# Altium PCB SW.PcbDoc (part 2 of 2)
Units mm, origin at the board's own origin, x right, y up, seen from the top; angles counter-clockwise.
Board outline 130 x 71 mm, 4 copper layers (Top Layer, Mid Layer 1, Mid Layer 2, Bottom Layer), stack 0.97 mm thick; 152 components, 272 nets, 858 pads, 548 vias.
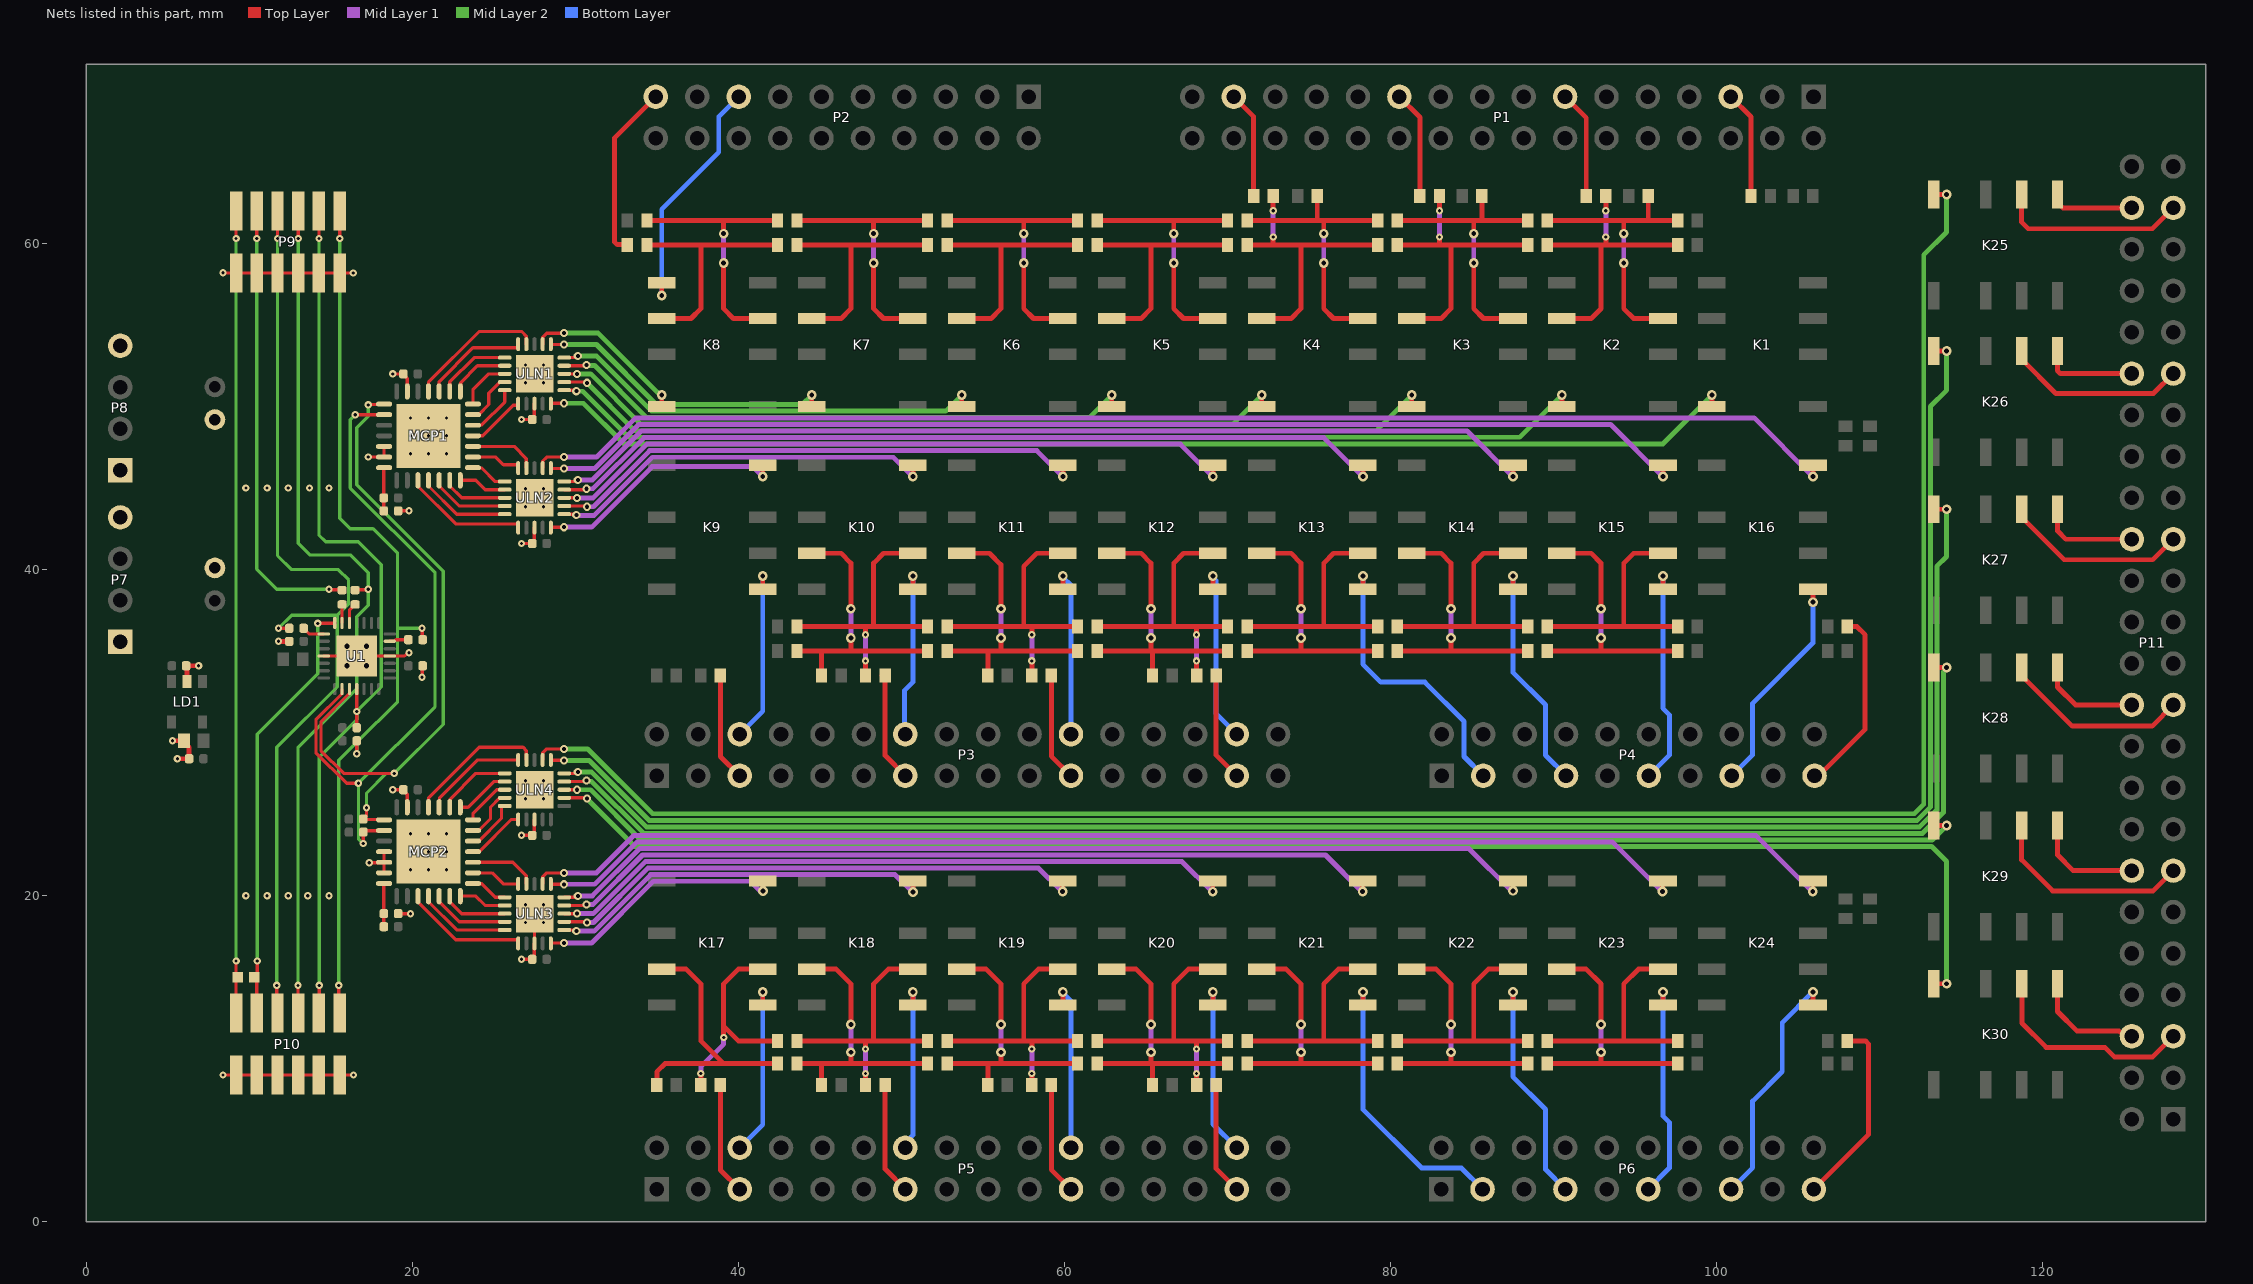
[diagram p4: the nets of this part, all layers, seen from the top]

## Via types
v1: diameter 0.45, hole 0.2, Top Layer to Bottom Layer, 300 vias
v2: diameter 0.6, hole 0.3, Top Layer to Bottom Layer, 176 vias
v3: diameter 0.5, hole 0.2, Top Layer to Bottom Layer, 34 vias
v4: diameter 0.5, hole 0.25, Top Layer to Bottom Layer, 30 vias
v5: diameter 0.66, hole 0.33, Top Layer to Bottom Layer, 4 vias
v6: diameter 5.5, hole 3, Top Layer to Bottom Layer, 4 vias

## Nets (pads, with @x,y where several pads share a name; then routed paths per layer and width w, separated by ;. In a path a pad name is that pad's centre, name@x,y a point inside that pad or via, vN(x,y) a via of type N, cw(c..) or ccw(c..) an arc to the next point about the centre after c; other vN are vias at no path point) (continued)
Bd18: K8.5 P2.15 | length 15
  Top Layer w0.3: v2(35.3,56.8) K8.5@35.3,57.6
  Bottom Layer w0.3: v2(35.3,56.8) 35.3,62.1 38.8,65.6 38.8,67.78 P2.15@40.02,69
Bd21: K9.5 P3.6 | length 11.1
  Top Layer w0.3: K9.5@41.5,38.8 v2(41.5,39.6)
  Bottom Layer w0.3: P3.6@40.08,29.9 41.5,31.32 v2(41.5,39.6)
Bd22: K10.5 P3.14 | length 10.7
  Top Layer w0.3: K10.5@50.7,38.8 v2(50.7,39.6)
  Bottom Layer w0.3: P3.14@50.24,29.9 50.2,29.94 50.2,32.6 50.7,33.1 v2(50.7,39.6)
Bd23: K11.5 P3.22 | length 10.7
  Top Layer w0.3: K11.5@59.9,38.8 v2(59.9,39.6)
  Bottom Layer w0.3: v2(59.9,39.6) 59.9,39.539 60.4,39.039 P3.22@60.4,29.9
Bd24: K12.5 P3.30 | length 11.1
  Top Layer w0.3: K12.5@69.1,38.8 v2(69.1,39.6)
  Bottom Layer w0.3: v2(69.1,39.6) 69.1,39.519 69.3,39.319 69.3,31.16 P3.30@70.56,29.9
Bd25: K13.5 P4.3 | length 17.7
  Top Layer w0.3: K13.5@78.3,38.8 v2(78.3,39.6)
  Bottom Layer w0.3: v2(78.3,39.6) 78.3,34.2 79.4,33.1 82.1,33.1 84.5,30.7 84.5,28.54 P4.3@85.68,27.36
Bd26: K14.5 P4.7 | length 14.4
  Top Layer w0.3: K14.5@87.5,38.8 v2(87.5,39.6)
  Bottom Layer w0.3: v2(87.5,39.6) 87.5,33.7 89.5,31.7 89.5,28.62 P4.7@90.76,27.36
Bd27: K15.5 P4.11 | length 13.7
  Top Layer w0.3: K15.5@96.7,38.8 v2(96.7,39.6)
  Bottom Layer w0.3: P4.11@95.84,27.36 97.1,28.62 97.1,31.1 96.7,31.5 v2(96.7,39.6)
Bd28: K16.5 P4.15 | length 13.5
  Top Layer w0.3: v2(105.9,38) K16.5@105.9,38.8
  Bottom Layer w0.3: P4.15@100.92,27.36 102.2,28.64 102.2,31.8 105.9,35.5 v2(105.9,38)
Bd31: K17.5 P5.6 | length 10.9
  Top Layer w0.3: K17.5@41.5,13.3 v2(41.5,14.1)
  Bottom Layer w0.3: P5.6@40.08,4.54 41.5,5.96 v2(41.5,14.1)
Bd32: K18.5 P5.14 | length 10.6
  Top Layer w0.3: K18.5@50.7,13.3 v2(50.7,14.1)
  Bottom Layer w0.3: P5.14@50.24,4.54 50.24,4.856 50.7,5.316 v2(50.7,14.1)
Bd33: K19.5 P5.22 | length 10.6
  Top Layer w0.3: K19.5@59.9,13.3 v2(59.9,14.1)
  Bottom Layer w0.3: v2(59.9,14.1) 59.9,14.039 60.4,13.539 P5.22@60.4,4.54
Bd34: K20.5 P5.30 | length 11
  Top Layer w0.3: K20.5@69.1,13.3 v2(69.1,14.1)
  Bottom Layer w0.3: v2(69.1,14.1) 69.1,6 P5.30@70.56,4.54
Bd35: K21.5 P6.3 | length 17.4
  Top Layer w0.3: K21.5@78.3,13.3 v2(78.3,14.1)
  Bottom Layer w0.3: v2(78.3,14.1) 78.3,6.9 81.9,3.3 84.34,3.3 P6.3@85.64,2
Bd36: K22.5 P6.7 | length 14.2
  Top Layer w0.3: K22.5@87.5,13.3 v2(87.5,14.1)
  Bottom Layer w0.3: v2(87.5,14.1) 87.5,8.9 89.5,6.9 89.5,3.22 P6.7@90.72,2
Bd37: K23.5 P6.11 | length 13.6
  Top Layer w0.3: K23.5@96.7,13.3 v2(96.7,14.1)
  Bottom Layer w0.3: P6.11@95.8,2 97.1,3.3 97.1,6.1 96.7,6.5 v2(96.7,14.1)
Bd38: K24.5 P6.15 | length 15
  Top Layer w0.3: K24.5@105.9,13.3 v2(105.9,14.1)
  Bottom Layer w0.3: P6.15@100.88,2 102.2,3.32 102.2,7.4 104.021,9.221 104.021,12.221 v2(105.9,14.1)
Bd41: K30.5 P11.6 | length 6.9
  Top Layer w0.3: K30.5@120.9,14.6 120.9,12.9 122.1,11.7 124.684,11.7 124.775,11.61 125.23,11.61 P11.6@125.46,11.38
Bd42: K29.5 P11.14 | length 6.8
  Top Layer w0.3: K29.5@120.9,24.3 120.9,22.5 121.86,21.54 P11.14@125.46,21.54
Bd43: K28.5 P11.22 | length 6.2
  Top Layer w0.3: K28.5@120.9,34 120.9,32.8 122,31.7 P11.22@125.46,31.7
Bd44: K27.5 P11.30 | length 6.1
  Top Layer w0.3: K27.5@120.9,43.7 120.9,42.376 121.416,41.86 P11.30@125.46,41.86
Bd45: K26.5 P11.38 | length 5.8
  Top Layer w0.3: K26.5@120.9,53.4 120.9,52.196 121.076,52.02 P11.38@125.46,52.02
Bd46: K25.5 P11.46 | length 5.2
  Top Layer w0.3: K25.5@120.9,63 120.9,62.5 121.22,62.18 P11.46@125.46,62.18
Bs11: P1.5 R2.2 | length 6.6
  Top Layer w0.3: P1.5@100.86,69 102.1,67.76 R2.2@102.1,62.9
Bs12: P1.13 R4.2 | length 6.6
  Top Layer w0.3: P1.13@90.7,69 92,67.7 R4.2@92,62.9
Bs13: P1.21 R6.2 | length 6.6
  Top Layer w0.3: P1.21@80.54,69 81.8,67.74 R6.2@81.8,62.9
Bs14: P1.29 R8.2 | length 6.6
  Top Layer w0.3: P1.29@70.38,69 71.6,67.78 R8.2@71.6,62.9
Bs18: P2.19 R10.2 | length 10.8
  Top Layer w0.3: R10.2@33.2,59.9 33.176,59.924 32.576,59.924 32.4,60.1 32.4,66.46 P2.19@34.94,69
Bs21: P3.5 R28.2 | length 6.6
  Top Layer w0.3: R28.2@38.9,33.5 38.9,28.54 P3.5@40.08,27.36
Bs22: P3.13 R30.2 | length 6.7
  Top Layer w0.3: R30.2@48.8,33.5 49,33.3 49,28.6 P3.13@50.24,27.36
Bs23: P3.21 R32.2 | length 6.6
  Top Layer w0.3: R32.2@59.2,33.5 59.2,28.56 P3.21@60.4,27.36
Bs24: P3.29 R34.2 | length 6.7
  Top Layer w0.3: R34.2@69.3,33.5 69.3,28.62 P3.29@70.56,27.36
Bs28: P4.19 R36.2 | length 11.4
  Top Layer w0.3: P4.19@106,27.36 106.26,27.36 109.1,30.2 109.1,36 108.6,36.5 R36.2@108,36.5
Bs31: P5.5 R54.2 | length 6.9
  Top Layer w0.3: R54.2@38.9,8.4 38.9,3.18 P5.5@40.08,2
Bs32: P5.13 R56.2 | length 6.9
  Top Layer w0.3: R56.2@49,8.4 49,3.24 P5.13@50.24,2
Bs33: P5.21 R58.2 | length 6.9
  Top Layer w0.3: R58.2@59.2,8.4 59.2,3.2 P5.21@60.4,2
Bs34: P5.29 R60.2 | length 6.9
  Top Layer w0.3: R60.2@69.3,8.4 69.3,3.26 P5.29@70.56,2
Bs38: P6.19 R62.2 | length 11.7
  Top Layer w0.3: P6.19@105.96,2 109.3,5.34 109.3,10.924 109.124,11.1 R62.2@108,11.1
Bs41: K30.6 P11.5 | length 13.1
  Top Layer w0.3: K30.6@118.7,14.6 118.724,14.576 118.724,12.176 120.2,10.7 123.8,10.7 124.4,10.1 126.72,10.1 P11.5@128,11.38
Bs42: K29.6 P11.13 | length 12.7
  Top Layer w0.3: K29.6@118.7,24.3 118.7,22.2 120.6,20.3 126.76,20.3 P11.13@128,21.54
Bs43: K28.6 P11.21 | length 11.6
  Top Layer w0.3: K28.6@118.7,34 118.7,33.5 121.8,30.4 126.7,30.4 P11.21@128,31.7
Bs44: K27.6 P11.29 | length 11.4
  Top Layer w0.3: K27.6@118.7,43.7 118.7,43.2 121.3,40.6 126.74,40.6 P11.29@128,41.86
Bs45: K26.6 P11.37 | length 11.2
  Top Layer w0.3: K26.6@118.7,53.4 118.7,52.9 120.8,50.8 126.78,50.8 P11.37@128,52.02
Bs46: K25.6 P11.45 | length 11.7
  Top Layer w0.3: K25.6@118.7,63 118.7,61.3 119.1,60.9 126.72,60.9 P11.45@128,62.18
GND: C1.1 C2.1 C3.2 C4.2 C5.1 C6.1 C7.2 C8.2 C9.2 C10.2 C11.2 C12.2 C13.2 C14.2 C15.2 LD1.2 MCP1.6 MCP1.12 MCP1.13 MCP1.29 MCP2.6 MCP2.11 MCP2.12 MCP2.13 MCP2.29 P7.1 P7.4 P8.1 P8.4 P9.1 P9.3 P9.5 P9.7 P9.9 P9.11 P10.1 P10.3 P10.5 P10.7 P10.9 P10.11 U1.4 U1.18 U1.29 ULN1.8 ULN1.21 ULN2.8 ULN2.21 ULN3.8 ULN3.21 ULN4.8 ULN4.21 | length 44.6
  Top Layer w0.2: v1(8.4,9) P10.1@9.2,9 P10.11@15.55,9 v1(16.4,9) ; v1(8.4,58.2) 8.4,58.19 P9.1@9.2,58.19 P9.11@15.55,58.19 v1(16.39,58.19) ; U1.18@14.575,34.7 U1.29@16.6,34.7 U1.4@18.625,34.7 19.532,34.7 19.732,34.9 v1(19.8,34.9) ; v1(17.3,46.9) MCP1.13@18.275,46.9 MCP1.12@18.275,47.55 ; v1(17.368,22.027) 18.252,22.027 MCP2.12@18.275,22.05 ; MCP2.13@18.275,21.4 MCP2.12@18.275,22.05 ; MCP2.11@18.275,22.7 MCP2.12@18.275,22.05 ; v1(18.8,26.5) C5.1@19.46,26.5 19.46,26.464 19.7,26.224 MCP2.6@19.7,25.425 ; v1(18.8,52) C1.1@19.46,52 19.46,51.964 19.7,51.724 MCP1.6@19.7,50.925 ; C6.1@19.14,18.9 v1(19.9,18.9) ; C2.1@19.14,43.6 v1(19.8,43.6) ; v1(20.6,33.4) 20.62,33.42 20.62,34.08 C14.2@20.64,34.1 C14.2@20.64,34.136 ; v1(26.7,16.1) C7.2@27.36,16.1 27.49,16.23 27.49,17.065 ULN3.8@27.5,17.075 ULN3.21@27.5,18.9 ; v1(26.7,23.7) C8.2@27.36,23.7 27.49,23.83 27.49,24.665 ULN4.8@27.5,24.675 ; v1(26.7,41.6) C4.2@27.36,41.6 27.49,41.73 27.49,42.565 ULN2.8@27.5,42.575 ; v1(26.7,49.2) C3.2@27.36,49.2 27.49,49.33 27.49,50.165 ULN1.8@27.5,50.175
  Top Layer w0.3: v1(5.3,29.5) C12.2@6,29.5 6,29.41 6.32,29.09 C13.2@6.32,28.4 v1(5.6,28.4) ; C11.2@6.14,34.1 C11.2@6.2,34.1 ; LD1.2@6.2,33.15 C11.2@6.2,34.1 ; v1(6.9,34.1) C11.2@6.2,34.1 ; v1(11.8,35.6) C15.2@12.46,35.6
  other v1: 9.8,20 11.1,20 12.4,20 13.6,20 14.9,20 9.8,45 11.1,45 12.4,45 13.7,45 14.9,45
  other v3: 26.95,18.35 28.05,18.35 26.95,19.45 28.05,19.45 19.9,21.6 21,21.6 22.1,21.6 19.9,22.7 21,22.7 22.1,22.7 19.9,23.8 21,23.8 22.1,23.8 26.95,25.95 28.05,25.95 26.95,27.05 28.05,27.05 26.95,43.85 28.05,43.85 26.95,44.95 28.05,44.95 19.9,47.1 21,47.1 22.1,47.1 19.9,48.2 21,48.2 22.1,48.2 19.9,49.3 21,49.3 22.1,49.3 26.95,51.45 28.05,51.45 26.95,52.55 28.05,52.55
  other v5: 16,34.1 17.2,34.1 16,35.3 17.2,35.3
INT: P9.12 P10.12 R80.1 R82.2 | length 56.7
  Top Layer w0.2: v1(15.5,14.5) 15.5,12.86 P10.12@15.55,12.81 ; v1(15.55,60.3) P9.12@15.55,62 ; v1(16.6,28.7) R82.2@16.6,29.5 ; v1(20.6,36.4) 20.62,36.38 20.62,35.72 R80.1@20.64,35.7
  Mid Layer 2 w0.2: v1(15.5,14.5) 15.5,28.3 16.6,29.4 ; v1(15.55,60.3) 15.55,43.15 16.2,42.5 17.6,42.5 19.1,41 19.1,36.4 ; v1(16.6,28.7) 16.6,29.4 ; v1(20.6,36.4) 19.1,36.4 ; 16.6,29.4 19.1,31.9 19.1,36.4
MISO: J1.2 P9.2 P10.2 | length 49.3
  Top Layer w0.2: P10.2@9.2,12.81 J1.2@9.2,14.908 ; v1(9.2,16) J1.2@9.2,14.908 ; v1(9.2,60.3) P9.2@9.2,62 ; J1.2@9.292,15 J1.2@9.2,14.908
  Mid Layer 2 w0.2: v1(9.2,16) v1(9.2,60.3)
MISO_T88: J1.1 P10.4 U1.14 | length 26.6
  Top Layer w0.2: P10.4@10.47,12.81 10.47,14.838 J1.1@10.308,15 10.5,15.192 v1(10.5,16) ; v1(14.2,36.7) 14.212,36.712 15.25,36.712 U1.14@15.25,36.725
  Mid Layer 2 w0.2: v1(10.5,16) 10.5,29.9 14.2,33.6 v1(14.2,36.7)
MOSI_T88: P9.4 R78.1 | length 27.7
  Top Layer w0.2: v1(10.47,60.3) P9.4@10.47,62 ; v1(14.9,38.8) 14.93,38.77 15.67,38.77 R78.1@15.7,38.74
  Mid Layer 2 w0.2: v1(10.47,60.3) 10.47,40.03 11.7,38.8 v1(14.9,38.8)
NetC2_2: C2.2 MCP1.14 R37.2 | length 2.7
  Top Layer w0.2: C2.2@18.26,43.6 R37.2@18.26,44.4 18.26,46.235 MCP1.14@18.275,46.25
NetC6_2: C6.2 MCP2.14 R52.2 | length 2.7
  Top Layer w0.2: R52.2@18.26,18.1 C6.2@18.26,18.9 18.26,20.735 MCP2.14@18.275,20.75
NetK2_3: K2.3 R3.1 R11.2 R12.1 | length 17.6
  Top Layer w0.3: R12.1@89.6,61.4 94.2,61.4 ; v2(94.3,58.8) 94.3,56 94.9,55.4 K2.3@96.7,55.4 ; v2(94.3,60.6) 94.3,61.3 94.2,61.4 ; R3.1@95.8,62.9 95.8,61.457 95.836,61.421 ; R11.2@97.6,61.4 94.2,61.4
  Mid Layer 1 w0.3: v2(94.3,58.8) v2(94.3,60.6)
NetK2_6: K2.6 R4.1 R18.2 R19.1 | length 17.5
  Top Layer w0.3: R19.1@89.6,59.9 92.9,59.9 ; K2.6@90.5,55.4 92.3,55.4 92.9,56 92.9,59.9 ; 93.2,59.9 v1(93.2,60.4) ; v1(93.2,62) R4.1@93.2,62.9 ; R18.2@97.6,59.9 92.9,59.9
  Mid Layer 1 w0.3: v1(93.2,60.4) v1(93.2,62)
NetK3_3: K3.3 R5.1 R12.2 R13.1 | length 17.6
  Top Layer w0.3: R13.1@80.4,61.4 85,61.4 ; v2(85.1,58.8) 85.1,56 85.7,55.4 K3.3@87.5,55.4 ; v2(85.1,60.6) 85.1,61.3 85,61.4 ; R5.1@85.6,62.9 85.6,61.4 ; R12.2@88.4,61.4 85.6,61.4 ; 85,61.4 85.6,61.4
  Mid Layer 1 w0.3: v2(85.1,58.8) v2(85.1,60.6)
NetK3_6: K3.6 R6.1 R19.2 R20.1 | length 17.5
  Top Layer w0.3: R20.1@80.4,59.9 83,59.9 ; K3.6@81.3,55.4 83.1,55.4 83.7,56 83.7,59.9 ; v1(83,60.4) 83,59.9 ; v1(83,62) R6.1@83,62.9 ; R19.2@88.4,59.9 83.7,59.9 ; 83,59.9 83.7,59.9
  Mid Layer 1 w0.3: v1(83,60.4) v1(83,62)
NetK4_3: K4.3 R7.1 R13.2 R14.1 | length 17.6
  Top Layer w0.3: R14.1@71.2,61.4 75.5,61.4 ; R7.1@75.5,62.9 75.5,61.4 ; v2(75.9,58.8) 75.9,56 76.5,55.4 K4.3@78.3,55.4 ; v2(75.9,60.6) 75.9,61.3 75.8,61.4 ; R13.2@79.2,61.4 75.8,61.4 ; 75.5,61.4 75.8,61.4
  Mid Layer 1 w0.3: v2(75.9,58.8) v2(75.9,60.6)
NetK4_6: K4.6 R8.1 R20.2 R21.1 | length 17.5
  Top Layer w0.3: R21.1@71.2,59.9 74.5,59.9 ; K4.6@72.1,55.4 73.9,55.4 74.5,56 74.5,59.9 ; 72.8,59.9 v1(72.8,60.4) ; v1(72.8,62) R8.1@72.8,62.9 ; R20.2@79.2,59.9 74.5,59.9
  Mid Layer 1 w0.3: v1(72.8,60.4) v1(72.8,62)
NetK5_3: K5.3 R14.2 R15.1 | length 16.1
  Top Layer w0.3: R15.1@62,61.4 66.6,61.4 ; v2(66.7,58.8) 66.7,56 67.3,55.4 K5.3@69.1,55.4 ; v2(66.7,60.6) 66.7,61.3 66.6,61.4 ; R14.2@70,61.4 66.6,61.4
  Mid Layer 1 w0.3: v2(66.7,58.8) v2(66.7,60.6)
NetK5_6: K5.6 R21.2 R22.1 | length 14.5
  Top Layer w0.3: R22.1@62,59.9 65.3,59.9 ; K5.6@62.9,55.4 64.7,55.4 65.3,56 65.3,59.9 ; R21.2@70,59.9 65.3,59.9
NetK6_3: K6.3 R15.2 R16.1 | length 16.1
  Top Layer w0.3: R16.1@52.8,61.4 57.4,61.4 ; v2(57.5,58.8) 57.5,56 58.1,55.4 K6.3@59.9,55.4 ; v2(57.5,60.6) 57.5,61.3 57.4,61.4 ; R15.2@60.8,61.4 57.4,61.4
  Mid Layer 1 w0.3: v2(57.5,58.8) v2(57.5,60.6)
NetK6_6: K6.6 R22.2 R23.1 | length 14.5
  Top Layer w0.3: R23.1@52.8,59.9 56.1,59.9 ; K6.6@53.7,55.4 55.5,55.4 56.1,56 56.1,59.9 ; R22.2@60.8,59.9 56.1,59.9
NetK7_3: K7.3 R16.2 R17.1 | length 16.1
  Top Layer w0.3: R17.1@43.6,61.4 48.2,61.4 ; v2(48.3,58.8) 48.3,56 48.9,55.4 K7.3@50.7,55.4 ; v2(48.3,60.6) 48.3,61.3 48.2,61.4 ; R16.2@51.6,61.4 48.2,61.4
  Mid Layer 1 w0.3: v2(48.3,58.8) v2(48.3,60.6)
NetK7_6: K7.6 R23.2 R24.1 | length 14.5
  Top Layer w0.3: R24.1@43.6,59.9 46.9,59.9 ; K7.6@44.5,55.4 46.3,55.4 46.9,56 46.9,59.9 ; R23.2@51.6,59.9 46.9,59.9
NetK8_3: K8.3 R9.1 R17.2 | length 16.1
  Top Layer w0.3: R9.1@34.4,61.4 39,61.4 ; v2(39.1,58.8) 39.1,56 39.7,55.4 K8.3@41.5,55.4 ; v2(39.1,60.6) 39.1,61.3 39,61.4 ; R17.2@42.4,61.4 39,61.4
  Mid Layer 1 w0.3: v2(39.1,58.8) v2(39.1,60.6)
NetK8_6: K8.6 R10.1 R24.2 | length 14.5
  Top Layer w0.3: R10.1@34.4,59.9 37.7,59.9 ; K8.6@35.3,55.4 37.1,55.4 37.7,56 37.7,59.9 ; R24.2@42.4,59.9 37.7,59.9
NetK10_3: K10.3 R29.1 R38.2 R39.1 | length 17.6
  Top Layer w0.3: R38.2@43.6,35 45.1,35 ; K10.3@44.5,41 46.3,41 46.9,40.4 v2(46.9,37.6) ; R29.1@45.1,33.5 45.1,35 ; v2(46.9,35.8) 46.9,35.1 47,35 ; R39.1@51.6,35 47,35 ; 45.1,35 47,35
  Mid Layer 1 w0.3: v2(46.9,35.8) v2(46.9,37.6)
NetK10_6: K10.6 R30.1 R45.2 R46.1 | length 17.5
  Top Layer w0.3: R45.2@43.6,36.5 48.3,36.5 ; R30.1@47.8,33.5 v1(47.8,34.4) ; v1(47.8,36) 47.8,36.5 ; K10.6@50.7,41 48.9,41 48.3,40.4 48.3,36.5 ; R46.1@51.6,36.5 48.3,36.5
  Mid Layer 1 w0.3: v1(47.8,34.4) v1(47.8,36)
NetK11_3: K11.3 R31.1 R39.2 R40.1 | length 17.5
  Top Layer w0.3: R39.2@52.8,35 55.3,35 ; K11.3@53.7,41 55.4,41 56.1,40.3 v2(56.1,37.6) ; R31.1@55.3,33.5 55.3,35 ; v2(56.1,35.8) 56.1,35 ; R40.1@60.8,35 56.1,35 ; 55.3,35 56.1,35
  Mid Layer 1 w0.3: v2(56.1,35.8) v2(56.1,37.6)
NetK11_6: K11.6 R32.1 R46.2 R47.1 | length 17.5
  Top Layer w0.3: R46.2@52.8,36.5 57.6,36.5 ; R32.1@58,33.5 v1(58,34.4) ; v1(58,36) 58,36.5 ; K11.6@59.9,41 58.3,41 57.5,40.2 57.5,36.6 57.6,36.5 ; R47.1@60.8,36.5 58,36.5 ; 57.6,36.5 58,36.5
  Mid Layer 1 w0.3: v1(58,34.4) v1(58,36)
NetK12_3: K12.3 R33.1 R40.2 R41.1 | length 17.6
  Top Layer w0.3: R40.2@62,35 65.4,35 ; K12.3@62.9,41 64.7,41 65.3,40.4 v2(65.3,37.6) ; v2(65.3,35.8) 65.3,35.1 65.4,35 ; R33.1@65.4,33.5 65.4,35 ; R41.1@70,35 65.4,35
  Mid Layer 1 w0.3: v2(65.3,35.8) v2(65.3,37.6)
NetK12_6: K12.6 R34.1 R47.2 R48.1 | length 17.5
  Top Layer w0.3: R47.2@62,36.5 66.7,36.5 ; R34.1@68.1,33.5 v1(68.1,34.4) ; v1(68.1,36) 68.1,36.5 ; K12.6@69.1,41 67.3,41 66.7,40.4 66.7,36.5 ; R48.1@70,36.5 66.7,36.5
  Mid Layer 1 w0.3: v1(68.1,34.4) v1(68.1,36)
NetK13_3: K13.3 R41.2 R42.1 | length 16.1
  Top Layer w0.3: R41.2@71.2,35 74.6,35 ; K13.3@72.1,41 73.9,41 74.5,40.4 v2(74.5,37.6) ; v2(74.5,35.8) 74.5,35.1 74.6,35 ; R42.1@79.2,35 74.6,35
  Mid Layer 1 w0.3: v2(74.5,35.8) v2(74.5,37.6)
NetK13_6: K13.6 R48.2 R49.1 | length 14.5
  Top Layer w0.3: R48.2@71.2,36.5 75.9,36.5 ; K13.6@78.3,41 76.5,41 75.9,40.4 75.9,36.5 ; R49.1@79.2,36.5 75.9,36.5
NetK14_3: K14.3 R42.2 R43.1 | length 16.1
  Top Layer w0.3: R42.2@80.4,35 83.8,35 ; K14.3@81.3,41 83.1,41 83.7,40.4 v2(83.7,37.6) ; v2(83.7,35.8) 83.7,35.1 83.8,35 ; R43.1@88.4,35 83.8,35
  Mid Layer 1 w0.3: v2(83.7,35.8) v2(83.7,37.6)
NetK14_6: K14.6 R49.2 R50.1 | length 14.5
  Top Layer w0.3: R49.2@80.4,36.5 85.1,36.5 ; K14.6@87.5,41 85.7,41 85.1,40.4 85.1,36.5 ; R50.1@88.4,36.5 85.1,36.5
NetK15_3: K15.3 R43.2 R44.1 | length 16.1
  Top Layer w0.3: R43.2@89.6,35 93,35 ; K15.3@90.5,41 92.3,41 92.9,40.4 v2(92.9,37.6) ; v2(92.9,35.8) 92.9,35.1 93,35 ; R44.1@97.6,35 93,35
  Mid Layer 1 w0.3: v2(92.9,35.8) v2(92.9,37.6)
NetK15_6: K15.6 R50.2 R51.1 | length 14.5
  Top Layer w0.3: R50.2@89.6,36.5 94.3,36.5 ; K15.6@96.7,41 94.9,41 94.3,40.4 94.3,36.5 ; R51.1@97.6,36.5 94.3,36.5
NetK17_3: K17.3 R53.1 R63.1 | length 16.7
  Top Layer w0.3: R53.1@35,8.4 35,9.2 35.5,9.7 39.1,9.7 ; K17.3@35.3,15.5 36.8,15.5 37.7,14.6 37.7,11.1 39.1,9.7 ; R63.1@42.4,9.7 39.1,9.7
NetK17_6: K17.6 R54.1 R70.1 | length 13.2
  Top Layer w0.3: R54.1@37.7,8.4 v1(37.7,9.1) ; v1(39.1,11.3) 39.1,12 ; K17.6@41.5,15.5 40,15.5 39.1,14.6 39.1,12 ; R70.1@42.4,11.1 40,11.1 39.1,12
  Mid Layer 1 w0.3: v1(37.7,9.1) 37.7,9.5 39.1,10.9 v1(39.1,11.3)
NetK18_3: K18.3 R55.1 R63.2 R64.1 | length 17
  Top Layer w0.3: R63.2@43.6,9.7 45.1,9.7 ; K18.3@44.5,15.5 46,15.5 46.9,14.6 v2(46.9,12.1) ; R55.1@45.1,8.4 45.1,9.7 ; v2(46.9,10.4) 46.9,9.7 ; R64.1@51.6,9.7 46.9,9.7 ; 45.1,9.7 46.9,9.7
  Mid Layer 1 w0.3: v2(46.9,10.4) v2(46.9,12.1)
NetK18_6: K18.6 R56.1 R70.2 R71.1 | length 17
  Top Layer w0.3: R70.2@43.6,11.1 47.8,11.1 ; R56.1@47.8,8.4 v1(47.8,9.1) ; v1(47.8,10.6) 47.8,11.1 ; K18.6@50.7,15.5 49.2,15.5 48.3,14.6 48.3,11.1 ; R71.1@51.6,11.1 48.3,11.1 ; 47.8,11.1 48.3,11.1
  Mid Layer 1 w0.3: v1(47.8,9.1) v1(47.8,10.6)
NetK19_3: K19.3 R57.1 R64.2 R65.1 | length 17
  Top Layer w0.3: R64.2@52.8,9.7 55.3,9.7 ; K19.3@53.7,15.5 55.2,15.5 56.1,14.6 v2(56.1,12.1) ; R57.1@55.3,8.4 55.3,9.7 ; v2(56.1,10.4) 56.1,9.7 ; R65.1@60.8,9.7 56.1,9.7 ; 55.3,9.7 56.1,9.7
  Mid Layer 1 w0.3: v2(56.1,10.4) v2(56.1,12.1)
NetK19_6: K19.6 R58.1 R71.2 R72.1 | length 17
  Top Layer w0.3: R71.2@52.8,11.1 57.5,11.1 ; R58.1@58,8.4 v1(58,9.1) ; v1(58,10.6) 58,11.1 ; K19.6@59.9,15.5 58.4,15.5 57.5,14.6 57.5,11.1 ; R72.1@60.8,11.1 58,11.1 ; 57.5,11.1 58,11.1
  Mid Layer 1 w0.3: v1(58,9.1) v1(58,10.6)
NetK20_3: K20.3 R59.1 R65.2 R66.1 | length 17
  Top Layer w0.3: R65.2@62,9.7 65.3,9.7 ; K20.3@62.9,15.5 64.4,15.5 65.3,14.6 v2(65.3,12.1) ; v2(65.3,10.4) 65.3,9.7 ; R59.1@65.4,8.4 65.4,9.6 65.3,9.7 ; R66.1@70,9.7 65.3,9.7
  Mid Layer 1 w0.3: v2(65.3,10.4) v2(65.3,12.1)
NetK20_6: K20.6 R60.1 R72.2 R73.1 | length 17
  Top Layer w0.3: R72.2@62,11.1 66.7,11.1 ; R60.1@68.1,8.4 v1(68.1,9.1) ; v1(68.1,10.6) 68.1,11.1 ; K20.6@69.1,15.5 67.6,15.5 66.7,14.6 66.7,11.1 ; R73.1@70,11.1 68.1,11.1 ; 66.7,11.1 68.1,11.1
  Mid Layer 1 w0.3: v1(68.1,9.1) v1(68.1,10.6)
NetK21_3: K21.3 R66.2 R67.1 | length 15.7
  Top Layer w0.3: R66.2@71.2,9.7 73.7,9.7 74.5,9.7 ; K21.3@72.1,15.5 73.6,15.5 74.5,14.6 v2(74.5,12.1) ; v2(74.5,10.4) 74.5,9.7 ; R67.1@79.2,9.7 74.5,9.7
  Mid Layer 1 w0.3: v2(74.5,10.4) v2(74.5,12.1)
NetK21_6: K21.6 R73.2 R74.1 | length 14.3
  Top Layer w0.3: R73.2@71.2,11.1 75.9,11.1 ; K21.6@78.3,15.5 76.8,15.5 75.9,14.6 75.9,11.1 ; R74.1@79.2,11.1 76.4,11.1 75.9,11.1
NetK22_3: K22.3 R67.2 R68.1 | length 15.7
  Top Layer w0.3: R67.2@80.4,9.7 82.9,9.7 83.7,9.7 ; K22.3@81.3,15.5 82.8,15.5 83.7,14.6 v2(83.7,12.1) ; v2(83.7,10.4) 83.7,9.7 ; R68.1@88.4,9.7 83.7,9.7
  Mid Layer 1 w0.3: v2(83.7,10.4) v2(83.7,12.1)
NetK22_6: K22.6 R74.2 R75.1 | length 14.3
  Top Layer w0.3: R74.2@80.4,11.1 85.1,11.1 ; K22.6@87.5,15.5 86,15.5 85.1,14.6 85.1,11.1 ; R75.1@88.4,11.1 85.6,11.1 85.1,11.1
NetK23_3: K23.3 R68.2 R69.1 | length 15.7
  Top Layer w0.3: R68.2@89.6,9.7 92.1,9.7 92.9,9.7 ; K23.3@90.5,15.5 92,15.5 92.9,14.6 v2(92.9,12.1) ; v2(92.9,10.4) 92.9,9.7 ; R69.1@97.6,9.7 92.9,9.7
  Mid Layer 1 w0.3: v2(92.9,10.4) v2(92.9,12.1)
NetK23_6: K23.6 R75.2 R76.1 | length 14.3
  Top Layer w0.3: R75.2@89.6,11.1 94.3,11.1 ; K23.6@96.7,15.5 95.2,15.5 94.3,14.6 94.3,11.1 ; R76.1@97.6,11.1 94.8,11.1 94.3,11.1
NetMCP1_1: MCP1.1 ULN1.2 | length 3.7
  Top Layer w0.2: MCP1.1@22.95,50.925 22.969,50.944 22.969,51.469 24,52.5 ULN1.2@25.675,52.5
NetMCP1_2: MCP1.2 ULN1.1 | length 4.6
  Top Layer w0.2: MCP1.2@22.3,50.925 22.306,50.931 22.306,51.506 23.8,53 ULN1.1@25.675,53
NetMCP1_3: MCP1.3 ULN1.20 | length 6.5
  Top Layer w0.2: MCP1.3@21.65,50.925 21.65,51.526 23.724,53.6 26.477,53.6 26.5,53.623 ULN1.20@26.5,53.825
NetMCP1_4: MCP1.4 ULN1.19 | length 8.5
  Top Layer w0.2: MCP1.4@21,50.925 21.006,50.931 21.006,51.506 24.1,54.6 26.715,54.6 26.994,54.32 26.994,53.831 ULN1.19@27,53.825
NetMCP1_17: MCP1.17 ULN2.6 | length 7.7
  Top Layer w0.2: MCP1.17@20.35,45.475 20.35,45.125 22.675,42.8 26.477,42.8 26.5,42.777 ULN2.6@26.5,42.575
NetMCP1_18: MCP1.18 ULN2.5 | length 5.7
  Top Layer w0.2: MCP1.18@21,45.475 21,45.125 22.725,43.4 ULN2.5@25.675,43.4
NetMCP1_19: MCP1.19 ULN2.4 | length 4.9
  Top Layer w0.2: MCP1.19@21.65,45.475 21.65,45.125 22.875,43.9 ULN2.4@25.675,43.9
NetMCP1_20: MCP1.20 ULN2.3 | length 4
  Top Layer w0.2: MCP1.20@22.3,45.475 22.3,45.125 23.025,44.4 ULN2.3@25.675,44.4
NetMCP1_21: MCP1.21 ULN2.2 | length 3
  Top Layer w0.2: MCP1.21@22.95,45.475 23.891,45.475 24.466,44.9 ULN2.2@25.675,44.9
NetMCP1_22: MCP1.22 ULN2.1 | length 2.3
  Top Layer w0.2: MCP1.22@23.725,46.25 23.744,46.231 24.269,46.231 25.1,45.4 ULN2.1@25.675,45.4
NetMCP1_23: MCP1.23 ULN2.20 | length 3.2
  Top Layer w0.2: MCP1.23@23.725,46.9 25.116,46.9 25.591,46.425 26.477,46.425 26.5,46.402 ULN2.20@26.5,46.225
NetMCP1_24: MCP1.24 ULN2.19 | length 4.2
  Top Layer w0.2: MCP1.24@23.725,47.55 26.25,47.55 27,46.8 ULN2.19@27,46.225
NetMCP1_25: MCP1.25 ULN1.6 | length 3.6
  Top Layer w0.2: MCP1.25@23.725,48.2 24.322,48.2 26.192,50.07 26.477,50.07 26.5,50.094 ULN1.6@26.5,50.175
NetMCP1_26: MCP1.26 ULN1.5 | length 3.3
  Top Layer w0.2: MCP1.26@23.725,48.85 23.744,48.869 24.269,48.869 25.675,50.275 ULN1.5@25.675,51
NetMCP1_27: MCP1.27 ULN1.4 | length 3.2
  Top Layer w0.2: MCP1.27@23.725,49.5 24.075,49.5 24.7,50.125 24.7,50.825 25.375,51.5 ULN1.4@25.675,51.5
NetMCP1_28: MCP1.28 ULN1.3 | length 3.2
  Top Layer w0.2: MCP1.28@23.725,50.15 23.725,51.025 24.7,52 ULN1.3@25.675,52
NetMCP2_1: MCP2.1 ULN4.2 | length 3.4
  Top Layer w0.2: MCP2.1@22.95,25.425 23.425,25.425 25,27 ULN4.2@25.675,27
NetMCP2_2: MCP2.2 ULN4.1 | length 4.5
  Top Layer w0.2: MCP2.2@22.3,25.425 22.319,25.444 22.319,25.919 23.9,27.5 ULN4.1@25.675,27.5
NetMCP2_3: MCP2.3 ULN4.20 | length 6.4
  Top Layer w0.2: MCP2.3@21.65,25.425 21.669,25.444 21.669,25.969 24.025,28.325 ULN4.20@26.5,28.325
NetMCP2_4: MCP2.4 ULN4.19 | length 8.5
  Top Layer w0.2: MCP2.4@21,25.425 21.006,25.431 21.006,26.006 24.1,29.1 26.8,29.1 27,28.9 ULN4.19@27,28.325
NetMCP2_17: MCP2.17 ULN3.6 | length 7.7
  Top Layer w0.2: MCP2.17@20.35,19.975 20.35,19.625 22.675,17.3 26.477,17.3 26.5,17.277 ULN3.6@26.5,17.075
NetMCP2_18: MCP2.18 ULN3.5 | length 5.7
  Top Layer w0.2: MCP2.18@21,19.975 21,19.625 22.725,17.9 ULN3.5@25.675,17.9
NetMCP2_19: MCP2.19 ULN3.4 | length 4.9
  Top Layer w0.2: MCP2.19@21.65,19.975 21.65,19.625 22.875,18.4 ULN3.4@25.675,18.4
NetMCP2_20: MCP2.20 ULN3.3 | length 4
  Top Layer w0.2: MCP2.20@22.3,19.975 22.3,19.625 23.025,18.9 ULN3.3@25.675,18.9
NetMCP2_21: MCP2.21 ULN3.2 | length 3
  Top Layer w0.2: MCP2.21@22.95,19.975 23.891,19.975 24.466,19.4 ULN3.2@25.675,19.4
NetMCP2_22: MCP2.22 ULN3.1 | length 2.3
  Top Layer w0.2: MCP2.22@23.725,20.75 23.744,20.731 24.269,20.731 25.1,19.9 ULN3.1@25.675,19.9
NetMCP2_23: MCP2.23 ULN3.20 | length 3.1
  Top Layer w0.2: MCP2.23@23.725,21.4 24.9,21.4 25.575,20.725 ULN3.20@26.5,20.725
NetMCP2_24: MCP2.24 ULN3.19 | length 4.1
  Top Layer w0.2: MCP2.24@23.725,22.05 26.159,22.05 26.992,21.218 26.992,20.733 ULN3.19@27,20.725
NetMCP2_25: MCP2.25 ULN4.6 | length 3.6
  Top Layer w0.2: MCP2.25@23.725,22.7 24.1,22.7 26.075,24.675 ULN4.6@26.5,24.675
NetMCP2_26: MCP2.26 ULN4.5 | length 3.3
  Top Layer w0.2: MCP2.26@23.725,23.35 24.075,23.35 25.475,24.75 25.475,25.477 25.498,25.5 ULN4.5@25.675,25.5
NetMCP2_27: MCP2.27 ULN4.4 | length 3.2
  Top Layer w0.2: MCP2.27@23.725,24 24.075,24 24.8,24.725 24.8,25.425 25.375,26 ULN4.4@25.675,26
NetMCP2_28: MCP2.28 ULN4.3 | length 2.9
  Top Layer w0.2: MCP2.28@23.725,24.65 23.725,25.025 25.19,26.49 25.665,26.49 ULN4.3@25.675,26.5
NetR77_2: R77.2 U1.12 | length 1.3
  Top Layer w0.2: U1.12@16.15,36.725 16.15,37.514 16.496,37.86 R77.2@16.5,37.86
NetR78_2: R78.2 U1.13 | length 1.1
  Top Layer w0.2: U1.13@15.7,36.725 15.7,37 R78.2@15.7,37.86
NetR79_2: R79.2 U1.15 | length 1.4
  Top Layer w0.2: R79.2@13.34,36.4 13.34,36.396 13.686,36.05 U1.15@14.575,36.05
NetR80_2: R80.2 U1.6 | length 1.2
  Top Layer w0.2: U1.6@18.625,35.6 18.9,35.6 19,35.7 R80.2@19.76,35.7
R11: K1.8 ULN1.10 | length 74.2
  Top Layer w0.2: ULN1.10@28.5,50.175 ULN1.10@28.5,50.175 28.523,50.2 v4(29.3,50.2)
  Top Layer w0.3: K1.8@99.7,50 v2(99.7,50.7)
  Mid Layer 2 w0.3: v4(29.3,50.2) 30.5,50.2 33,47.7 96.7,47.7 v2(99.7,50.7)
R12: K2.8 ULN1.11 | length 64.1
  Top Layer w0.2: ULN1.11@29.325,51 30.003,51 v4(30.064,50.939)
  Top Layer w0.3: K2.8@90.5,50 v2(90.5,50.7)
  Mid Layer 2 w0.3: v4(30.064,50.939) 30.461,50.939 33.285,48.115 87.915,48.115 v2(90.5,50.7)
R13: K3.8 ULN1.12 | length 54.8
  Top Layer w0.2: ULN1.12@29.325,51.5 30.719,51.5 v4(30.719,51.454)
  Top Layer w0.3: K3.8@81.3,50 v2(81.3,50.7)
  Mid Layer 2 w0.3: v4(30.719,51.454) 33.657,48.517 79.117,48.517 v2(81.3,50.7)
R14: K4.8 ULN1.13 | length 45.5
  Top Layer w0.2: ULN1.13@29.325,52 v4(30.1,52)
  Top Layer w0.3: K4.8@72.1,50 v2(72.1,50.7)
  Mid Layer 2 w0.3: v4(30.1,52) 30.94,52 34.022,48.918 61.686,48.918 70.318,48.918 v2(72.1,50.7)
R15: K5.8 ULN1.14 | length 36.2
  Top Layer w0.2: ULN1.14@29.325,52.5 30.637,52.5 v4(30.692,52.555)
  Top Layer w0.3: K5.8@62.9,50 v2(62.9,50.7)
  Mid Layer 2 w0.3: v4(30.692,52.555) 30.73,52.517 31.183,52.517 34.38,49.32 61.52,49.32 v2(62.9,50.7)
R16: K6.8 ULN1.15 | length 26.9
  Top Layer w0.2: ULN1.15@29.325,53 29.981,53 30.073,53.093 v4(30.154,53.093)
  Top Layer w0.3: K6.8@53.7,50 v2(53.7,50.7)
  Mid Layer 2 w0.3: v4(30.154,53.093) 31.307,53.093 34.679,49.721 52.721,49.721 v2(53.7,50.7)
R17: K7.8 ULN1.16 | length 18.5
  Top Layer w0.2: ULN1.16@28.5,53.825 28.5,53.823 28.523,53.8 v4(29.3,53.8)
  Top Layer w0.3: K7.8@44.5,50 v2(44.5,50.7)
  Mid Layer 2 w0.3: v4(29.3,53.8) 31.3,53.8 34.977,50.123 43.923,50.123 v2(44.5,50.7)
R18: K8.8 ULN1.17 | length 10.1
  Top Layer w0.2: ULN1.17@28,53.825 28.01,53.835 28.01,54.26 28.25,54.5 v4(29.3,54.5)
  Top Layer w0.3: K8.8@35.3,50 v2(35.3,50.7)
  Mid Layer 2 w0.3: v4(29.3,54.5) 31.4,54.5 35.05,50.85 35.069,50.85 35.219,50.7 v2(35.3,50.7)
R21: K9.8 ULN2.10 | length 15.5
  Top Layer w0.2: ULN2.10@28.5,42.575 28.5,42.577 28.523,42.6 v4(29.3,42.6)
  Top Layer w0.3: v2(41.5,45.7) K9.8@41.5,46.4
  Mid Layer 1 w0.3: v4(29.3,42.6) 31,42.6 34.713,46.313 40.887,46.313 v2(41.5,45.7)
R22: K10.8 ULN2.11 | length 24.1
  Top Layer w0.2: ULN2.11@29.325,43.4 30.003,43.4 v4(30.064,43.339)
  Top Layer w0.3: v2(50.7,45.7) K10.8@50.7,46.4
  Mid Layer 1 w0.3: v4(30.064,43.339) 30.076,43.327 31.159,43.327 34.722,46.89 49.51,46.89 v2(50.7,45.7)
R23: K11.8 ULN2.12 | length 33.4
  Top Layer w0.2: ULN2.12@29.325,43.9 30.674,43.9 v4(30.719,43.854)
  Top Layer w0.3: v2(59.9,45.7) K11.8@59.9,46.4
  Mid Layer 1 w0.3: v4(30.719,43.854) 31.118,43.854 34.556,47.292 58.308,47.292 v2(59.9,45.7)
R24: K12.8 ULN2.13 | length 42.7
  Top Layer w0.2: ULN2.13@29.325,44.4 v4(30.1,44.4)
  Top Layer w0.3: v2(69.1,45.7) K12.8@69.1,46.4
  Mid Layer 1 w0.3: v4(30.1,44.4) 31.096,44.4 34.39,47.694 67.106,47.694 v2(69.1,45.7)
R25: K13.8 ULN2.14 | length 52
  Top Layer w0.2: ULN2.14@29.325,44.9 30.637,44.9 v4(30.692,44.955)
  Top Layer w0.3: v2(78.3,45.7) K13.8@78.3,46.4
  Mid Layer 1 w0.3: v4(30.692,44.955) 31.083,44.955 34.223,48.095 75.905,48.095 v2(78.3,45.7)
R26: K14.8 ULN2.15 | length 61.3
  Top Layer w0.2: ULN2.15@29.325,45.4 29.981,45.4 30.073,45.493 v4(30.154,45.493)
  Top Layer w0.3: v2(87.5,45.7) K14.8@87.5,46.4
  Mid Layer 1 w0.3: v4(30.154,45.493) 31.053,45.493 34.057,48.497 84.703,48.497 v2(87.5,45.7)
R27: K15.8 ULN2.16 | length 71.4
  Top Layer w0.2: ULN2.16@28.5,46.225 ULN2.16@28.5,46.225 28.523,46.2 v4(29.3,46.2)
  Top Layer w0.3: v2(96.7,45.7) K15.8@96.7,46.4
  Mid Layer 1 w0.3: v4(29.3,46.2) 31.192,46.2 33.891,48.898 93.502,48.898 v2(96.7,45.7)
R28: K16.8 ULN2.17 | length 81.6
  Top Layer w0.2: ULN2.17@28,46.225 28.01,46.235 28.01,46.66 28.25,46.9 v4(29.3,46.9)
  Top Layer w0.3: v2(105.9,45.7) K16.8@105.9,46.4
  Mid Layer 1 w0.3: v4(29.3,46.9) 31.3,46.9 33.7,49.3 102.3,49.3 v2(105.9,45.7)
R31: K17.8 ULN3.10 | length 15.5
  Top Layer w0.2: ULN3.10@28.5,17.075 28.5,17.077 28.523,17.1 v4(29.3,17.1)
  Top Layer w0.3: K17.8@41.5,20.9 41.496,20.896 41.515,20.876 v2(41.515,20.283)
  Mid Layer 1 w0.3: v4(29.3,17.1) 31,17.1 34.789,20.889 40.73,20.889 41.336,20.283 v2(41.515,20.283)
R32: K18.8 ULN3.11 | length 24
  Top Layer w0.2: ULN3.11@29.325,17.9 29.335,17.89 30.012,17.89 v4(30.064,17.839)
  Top Layer w0.3: K18.8@50.7,20.9 50.713,20.887 v2(50.713,20.236)
  Mid Layer 1 w0.3: v4(30.064,17.839) 30.076,17.827 31.159,17.827 34.622,21.29 49.61,21.29 50.664,20.236 v2(50.713,20.236)
R33: K19.8 ULN3.12 | length 33.2
  Top Layer w0.2: ULN3.12@29.325,18.4 30.674,18.4 v4(30.719,18.354)
  Top Layer w0.3: v2(59.889,20.263) 59.889,20.889 K19.8@59.9,20.9
  Mid Layer 1 w0.3: v4(30.719,18.354) 31.118,18.354 34.456,21.692 58.408,21.692 59.837,20.263 v2(59.889,20.263)
R34: K20.8 ULN3.13 | length 42.5
  Top Layer w0.2: ULN3.13@29.325,18.9 v4(30.1,18.9)
  Top Layer w0.3: v2(69.091,20.247) 69.091,20.891 K20.8@69.1,20.9
  Mid Layer 1 w0.3: v4(30.1,18.9) 31.096,18.9 34.29,22.094 67.206,22.094 69.053,20.247 v2(69.091,20.247)
R35: K21.8 ULN3.14 | length 51.8
  Top Layer w0.2: ULN3.14@29.325,19.4 30.637,19.4 v4(30.692,19.455)
  Top Layer w0.3: v2(78.289,20.257) 78.289,20.889 K21.8@78.3,20.9
  Mid Layer 1 w0.3: v4(30.692,19.455) 31.083,19.455 34.123,22.495 76.005,22.495 78.243,20.257 v2(78.289,20.257)
R36: K22.8 ULN3.15 | length 61.1
  Top Layer w0.2: ULN3.15@29.325,19.9 29.981,19.9 30.073,19.993 v4(30.154,19.993)
  Top Layer w0.3: K22.8@87.5,20.9 87.505,20.895 v2(87.505,20.301)
  Mid Layer 1 w0.3: v4(30.154,19.993) 31.053,19.993 33.957,22.897 84.803,22.897 87.399,20.301 v2(87.505,20.301)
R37: K23.8 ULN3.16 | length 71.2
  Top Layer w0.2: ULN3.16@28.5,20.725 28.5,20.723 28.523,20.7 v4(29.3,20.7)
  Top Layer w0.3: v2(96.682,20.262) 96.682,20.882 K23.8@96.7,20.9
  Mid Layer 1 w0.3: v4(29.3,20.7) 31.192,20.7 33.791,23.298 93.602,23.298 96.638,20.262 v2(96.682,20.262)
R38: K24.8 ULN3.17 | length 81.4
  Top Layer w0.2: ULN3.17@28,20.725 28.01,20.735 28.01,21.16 28.25,21.4 v4(29.3,21.4)
  Top Layer w0.3: v2(105.891,20.265) 105.891,20.891 K24.8@105.9,20.9
  Mid Layer 1 w0.3: v4(29.3,21.4) 31.3,21.4 33.6,23.7 102.4,23.7 105.835,20.265 v2(105.891,20.265)
R41: K30.8 ULN4.12 | length 94.7
  Top Layer w0.2: ULN4.12@29.325,26 30.674,26 v4(30.719,25.954)
  Top Layer w0.3: K30.8@113.3,14.6 v2(114.1,14.6)
  Mid Layer 2 w0.3: v4(30.719,25.954) 33.657,23.017 113.183,23.017 114.1,22.1 v2(114.1,14.6)
R42: K29.8 ULN4.13 | length 87.2
  Top Layer w0.2: ULN4.13@29.325,26.5 v4(30.1,26.5)
  Top Layer w0.3: K29.8@113.3,24.3 v2(114.1,24.3)
  Mid Layer 2 w0.3: v4(30.1,26.5) 30.94,26.5 34.022,23.418 61.686,23.418 113.218,23.418 v2(114.1,24.3)
R43: K28.8 ULN4.14 | length 96.3
  Top Layer w0.2: ULN4.14@29.325,27 30.637,27 v4(30.692,27.055)
  Top Layer w0.3: K28.8@113.3,34 v2(114.1,34)
  Mid Layer 2 w0.3: v4(30.692,27.055) 30.73,27.017 30.992,27.017 34.188,23.82 61.52,23.82 112.62,23.82 113.902,25.102 113.902,33.72 114.1,33.919 v2(114.1,34)
R44: K27.8 ULN4.15 | length 105.5
  Top Layer w0.2: ULN4.15@29.325,27.5 29.981,27.5 30.073,27.593 v4(30.154,27.593)
  Top Layer w0.3: K27.8@113.3,43.7 v2(114.1,43.7)
  Mid Layer 2 w0.3: v4(30.154,27.593) 30.983,27.593 34.355,24.221 112.453,24.221 113.5,25.268 113.5,40.2 114.1,40.8 v2(114.1,43.7)
R45: K26.8 ULN4.16 | length 115.6
  Top Layer w0.2: ULN4.16@28.5,28.325 28.5,28.323 28.523,28.3 v4(29.3,28.3)
  Top Layer w0.3: K26.8@113.3,53.4 113.4,53.4 v2(114.1,53.4)
  Mid Layer 2 w0.3: v4(29.3,28.3) 30.844,28.3 34.521,24.623 112.287,24.623 113.098,25.434 113.098,49.998 114.1,51 v2(114.1,53.4)
R46: K25.8 ULN4.17 | length 125.9
  Top Layer w0.2: ULN4.17@28,28.325 28.01,28.335 28.01,28.76 28.25,29 v4(29.3,29)
  Top Layer w0.3: K25.8@113.3,63 v2(114.1,63)
  Mid Layer 2 w0.3: v4(29.3,29) 30.768,29 34.743,25.025 112.121,25.025 112.697,25.601 112.697,59.297 114.1,60.7 v2(114.1,63)
R\E\S\E\T\: P9.10 P10.10 R81.2 U1.25 | length 55.9
  Top Layer w0.2: P10.10@14.28,12.81 14.3,12.83 v1(14.3,14.5) ; v1(14.28,60.3) P9.10@14.28,62 ; R81.2@16.6,30.3 v1(16.6,31.3) U1.25@16.6,32.675
  Mid Layer 2 w0.2: v1(14.28,60.3) 14.28,42.12 14.7,41.7 16.7,41.7 18.1,40.3 18.1,32.8 v1(16.6,31.3) 16.6,30.8 14.3,28.5 v1(14.3,14.5)
S\S\: P9.8 P10.8 R77.1 | length 55
  Top Layer w0.2: v1(13,14.5) 13,12.82 P10.8@13.01,12.81 ; v1(13.01,60.3) P9.8@13.01,62 ; R77.1@16.5,38.74 16.53,38.77 17.27,38.77 v1(17.3,38.8)
  Mid Layer 2 w0.2: v1(13,14.5) 13,29.1 16.6,32.7 16.6,37.1 17.3,37.8 v1(17.3,38.8) 17.3,39.8 16.2,40.9 13.717,40.9 13.01,41.607 v1(13.01,60.3)
SCK: P9.6 P10.6 R79.1 | length 59.1
  Top Layer w0.2: v1(11.7,14.5) 11.7,12.85 P10.6@11.74,12.81 ; v1(11.74,60.3) P9.6@11.74,62 ; v1(11.8,36.4) R79.1@12.46,36.4
  Mid Layer 2 w0.2: v1(11.7,14.5) 11.7,29.1 15.4,32.8 15.4,37.2 ; v1(11.74,60.3) 11.74,40.86 12.6,40 15.465,40 16.1,39.365 16.1,37.9 15.4,37.2 ; v1(11.8,36.4) 12.6,37.2 15.4,37.2
SCL: MCP1.8 MCP2.8 R84.2 U1.24 | length 42.1
  Top Layer w0.2: U1.24@16.15,32.675 16.15,32.4 14.4,30.65 14.4,28.9 15.8,27.5 v1(18.9,27.5) ; v1(17.2,25.4) 17.2,24.9 R84.2@17,24.7 17.031,24.669 18.256,24.669 MCP2.8@18.275,24.65 ; v1(17.3,50.1) 17.331,50.131 18.256,50.131 MCP1.8@18.275,50.15 MCP1.8@18.256,50.169
  Mid Layer 2 w0.2: v1(17.2,25.4) 17.2,26.3 18.4,27.5 v1(18.9,27.5) 21.9,30.5 21.9,39.9 16.6,45.2 16.6,48.7 17.3,49.4 v1(17.3,50.1)
SDA: MCP1.9 MCP2.9 R83.2 U1.23 | length 42.4
  Top Layer w0.2: U1.23@15.7,32.675 15.7,32.4 14.098,30.798 14.098,28.775 15.973,26.9 v1(16.7,26.9) ; v1(16.5,49.5) MCP1.9@18.275,49.5 ; v1(17,23.2) R83.2@17,23.9 17.081,23.981 18.256,23.981 MCP2.9@18.275,24
  Mid Layer 2 w0.2: v1(16.5,49.5) 16.2,49.2 16.2,45 21.4,39.8 21.4,31.6 v1(16.7,26.9) 16.7,23.5 v1(17,23.2)
pads on no net: K5.2 K5.7 K6.2 K6.7 K7.2 K7.7 K8.2 K8.7 K13.2 K13.7 K14.2 K14.7 K15.2 K15.7 K16.2 K16.7 K21.2 K21.7 K22.2 K22.7 K23.2 K23.7 K24.2 K24.7 LD1.4 MCP1.7 MCP1.10 MCP1.15 MCP1.16 MCP2.7 MCP2.10 MCP2.15 MCP2.16 U1.1 U1.2 U1.5 U1.7 U1.8 U1.9 U1.10 U1.11 U1.17 U1.19 U1.20 U1.21 U1.22 U1.26 U1.27 U1.28 ULN1.7 ULN1.18 ULN2.7 ULN2.18 ULN3.7 ULN3.18 ULN4.7 ULN4.10 ULN4.11 ULN4.18
copper on no net:
  other v6: 5.25,3 120.25,3 5.25,68 120.25,68

## Polygon pours and split planes (outlines as drawn)
no net on Top Layer "NONET_L-01_P-001" (solid, remove dead copper, pour order 9): 111,24 111,0 33,0 33,24
GND on Top Layer "NONET_L-01_P-001" (solid, remove dead copper, pour order 17): 0,71 0,0 30,0 30,71
AGND1 on Top Layer "NONET_L-01_P-001" (solid, remove dead copper, pour order 3): 33,48.6 33,71 111,71 111,48.6
AGND2 on Top Layer "NONET_L-01_P-001" (solid, remove dead copper, pour order 2): 111,25.7 33,25.7 33,47.8 111,47.8
AGND3 on Top Layer "NONET_L-01_P-001" (solid, remove dead copper, pour order 1): 111,24 111,0 33,0 33,24
AGND4 on Top Layer "NONET_L-01_P-001" (solid, remove dead copper, pour order 0): 111.2,71 111.2,0 130,0 130,71
+3.3V on Mid Layer 1 "NONET_L-01_P-001" (solid, remove dead copper, pour order 18): 0,71 0,0 30,0 30,71
AGND3 on Mid Layer 1 "NONET_L-01_P-001" (solid, remove dead copper, pour order 5): 111,24 111,0 33,0 33,24
AGND2 on Mid Layer 1 "NONET_L-01_P-001" (solid, remove dead copper, pour order 6): 111,25.7 33,25.7 33,47.8 111,47.8
AGND1 on Mid Layer 1 "NONET_L-01_P-001" (solid, remove dead copper, pour order 7): 33,48.6 33,71 111,71 111,48.6
AGND4 on Mid Layer 1 "NONET_L-01_P-001" (solid, remove dead copper, pour order 4): 111.2,71 111.2,0 130,0 130,71
GND on Mid Layer 2 "NONET_L-01_P-001" (solid, remove dead copper, pour order 19): 0,71 0,0 30,0 30,71
AGND3 on Mid Layer 2 "NONET_L-01_P-001" (solid, remove dead copper, pour order 12): 111,24 111,0 33,0 33,24
AGND2 on Mid Layer 2 "NONET_L-01_P-001" (solid, remove dead copper, pour order 10): 111,25.7 33,25.7 33,47.8 111,47.8
AGND1 on Mid Layer 2 "NONET_L-01_P-001" (solid, remove dead copper, pour order 11): 33,48.6 33,71 111,71 111,48.6
AGND4 on Mid Layer 2 "NONET_L-01_P-001" (solid, remove dead copper, pour order 8): 111.2,71 111.2,0 130,0 130,71
GND on Bottom Layer "NONET_L-01_P-001" (solid, remove dead copper, pour order 20): 0,71 0,0 30,0 30,71
AGND4 on Bottom Layer "NONET_L-01_P-001" (solid, remove dead copper, pour order 13): 111.2,71 111.2,0 130,0 130,71
AGND3 on Bottom Layer "NONET_L-01_P-001" (solid, remove dead copper, pour order 16): 111,24 111,0 33,0 33,24
AGND2 on Bottom Layer "NONET_L-01_P-001" (solid, remove dead copper, pour order 14): 111,25.7 33,25.7 33,47.8 111,47.8
AGND1 on Bottom Layer "NONET_L-01_P-001" (solid, remove dead copper, pour order 15): 33,48.6 33,71 111,71 111,48.6
no net on Top Overlay "NONET_L-01_P-001" (solid): 52.6,-0.15 52.6,0.75 55.2,0.75 55.2,-0.15
no net on Top Overlay "NONET_L-01_P-001" (solid): 93.2,-0.15 93.2,0.75 95.8,0.75 95.8,-0.15
no net on Top Overlay "NONET_L-01_P-001" (solid): 93.3,25.25 93.3,26.15 95.9,26.15 95.9,25.25
no net on Top Overlay "NONET_L-01_P-001" (solid): 52.8,25.25 52.8,26.15 55.4,26.15 55.4,25.25
no net on Top Overlay "NONET_L-01_P-001" (solid): 45,70.35 45,71.25 47.6,71.25 47.6,70.35
no net on Top Overlay "NONET_L-01_P-001" (solid): 85.6,70.25 85.6,71.15 88.2,71.15 88.2,70.25
no net on Top Overlay "NONET_L-01_P-001" (solid): 11.25,56.5 11.25,55.7 13.45,55.7 13.45,56.5
no net on Top Overlay "NONET_L-01_P-001" (solid): 11.25,7.4 11.25,6.6 13.45,6.6 13.45,7.4

## Other copper
Top Layer:
  text "By: / ElShiny" at 21.034,0.3 h1

## Silkscreen, mask and mechanical layers (free items; w line width, h text height)
Top Overlay:
  lines w0.2: 8.35,7.4 16.65,7.4 ; 8.35,56.5 16.65,56.5 ; 0.861,6.401 3.361,6.401 3.361,16.7 0.861,16.7 0.861,6.401
  text "-A" at 106.5,60.6 h1
  text "-B" at 106.5,59.1 h1
  text "V1.0" at 2.84,58.072 h1 r90
  text "DATA IN" at 18.354,56.313 h1 r90
  text "Ext." at 109.5,50.5 h1 r90
  text "G +5 +12 G" at 5.1,44.9 h1 r90
  text "B-" at 32.9,35.7 h1
  text "G +5 +12 G" at 5.1,34.4 h1 r90
  text "A-" at 32.9,34.2 h1
  text "2023" at 4.9,23.3 h1 r90
  text "Ext." at 109.5,20.7 h1 r90
  text "(c) Distopik Ltd." at 3.2,18 h1 r90
  text "B-" at 32.859,10.378 h1
  text "A-" at 32.859,8.878 h1
  text "DATA OUT" at 18.274,7.107 h1 r90
  text "UNIREL-SW" at 2.861,7.001 h1 r90
Mechanical 1:
  lines w0.2: 30,0 30,71 ; 111.1,0 111.1,71 ; 0,0 0,71 130,71 130,0 0,0

## Text inside footprints (layer, text, board x,y; h text height)
C9: Top Overlay "+" at 8.6,53 h1.5 r90
C10: Top Overlay "+" at 7.2,36.3 h1.5 r270
P1: Top Overlay "2" at 108.48,66.968 h1.27 r180; Top Overlay "1" at 108.48,69.508 h1.27 r180; Top Overlay "31" at 66.316,69.508 h1.27 r180; Top Overlay "32" at 66.316,66.968 h1.27 r180
P2: Top Overlay "20" at 33.416,66.968 h1.27 r180; Top Overlay "19" at 33.416,69.508 h1.27 r180; Top Overlay "1" at 60.34,69.508 h1.27 r180; Top Overlay "2" at 60.34,66.968 h1.27 r180
P3: Top Overlay "2" at 32.46,29.392 h1.27; Top Overlay "1" at 32.46,26.852 h1.27; Top Overlay "31" at 74.624,26.852 h1.27; Top Overlay "32" at 74.624,29.392 h1.27
P4: Top Overlay "20" at 107.524,29.392 h1.27; Top Overlay "19" at 107.524,26.852 h1.27; Top Overlay "1" at 80.6,26.852 h1.27; Top Overlay "2" at 80.6,29.392 h1.27
P5: Top Overlay "32" at 74.624,4.032 h1.27; Top Overlay "31" at 74.624,1.492 h1.27; Top Overlay "1" at 32.46,1.492 h1.27; Top Overlay "2" at 32.46,4.032 h1.27
P6: Top Overlay "2" at 80.56,4.032 h1.27; Top Overlay "1" at 80.56,1.492 h1.27; Top Overlay "19" at 107.484,1.492 h1.27; Top Overlay "20" at 107.484,4.032 h1.27
P11: Top Overlay "47" at 128.508,66.752 h1.27 r90; Top Overlay "48" at 125.968,66.752 h1.27 r90; Top Overlay "1" at 128.508,3.76 h1.27 r90; Top Overlay "2" at 125.968,3.76 h1.27 r90